# EAGLE board Maverick (EAGLE 9.6.2)
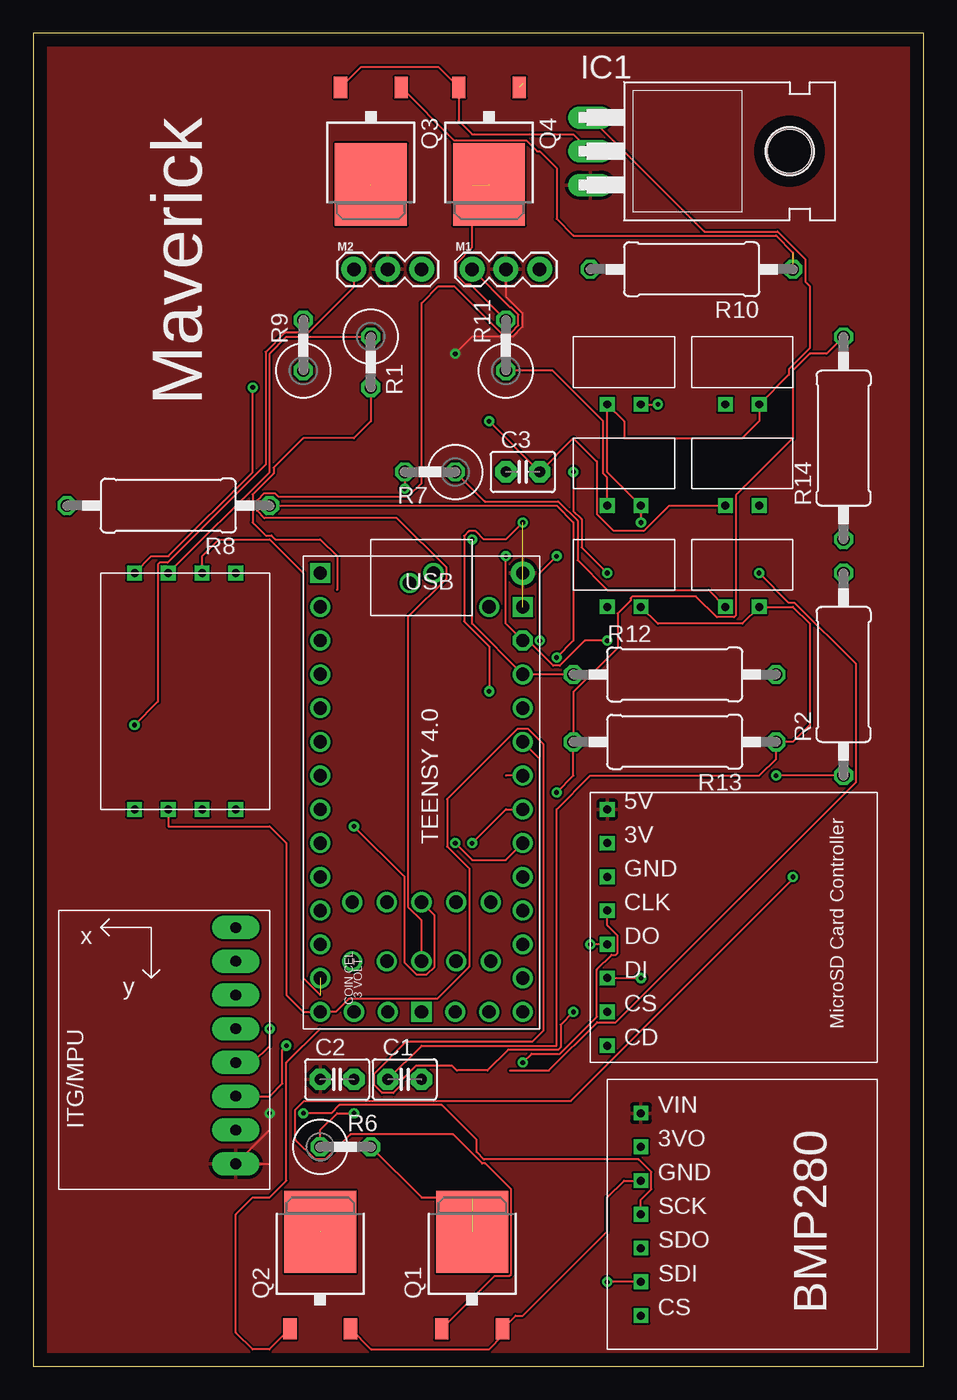
[diagram p0: board, top side]
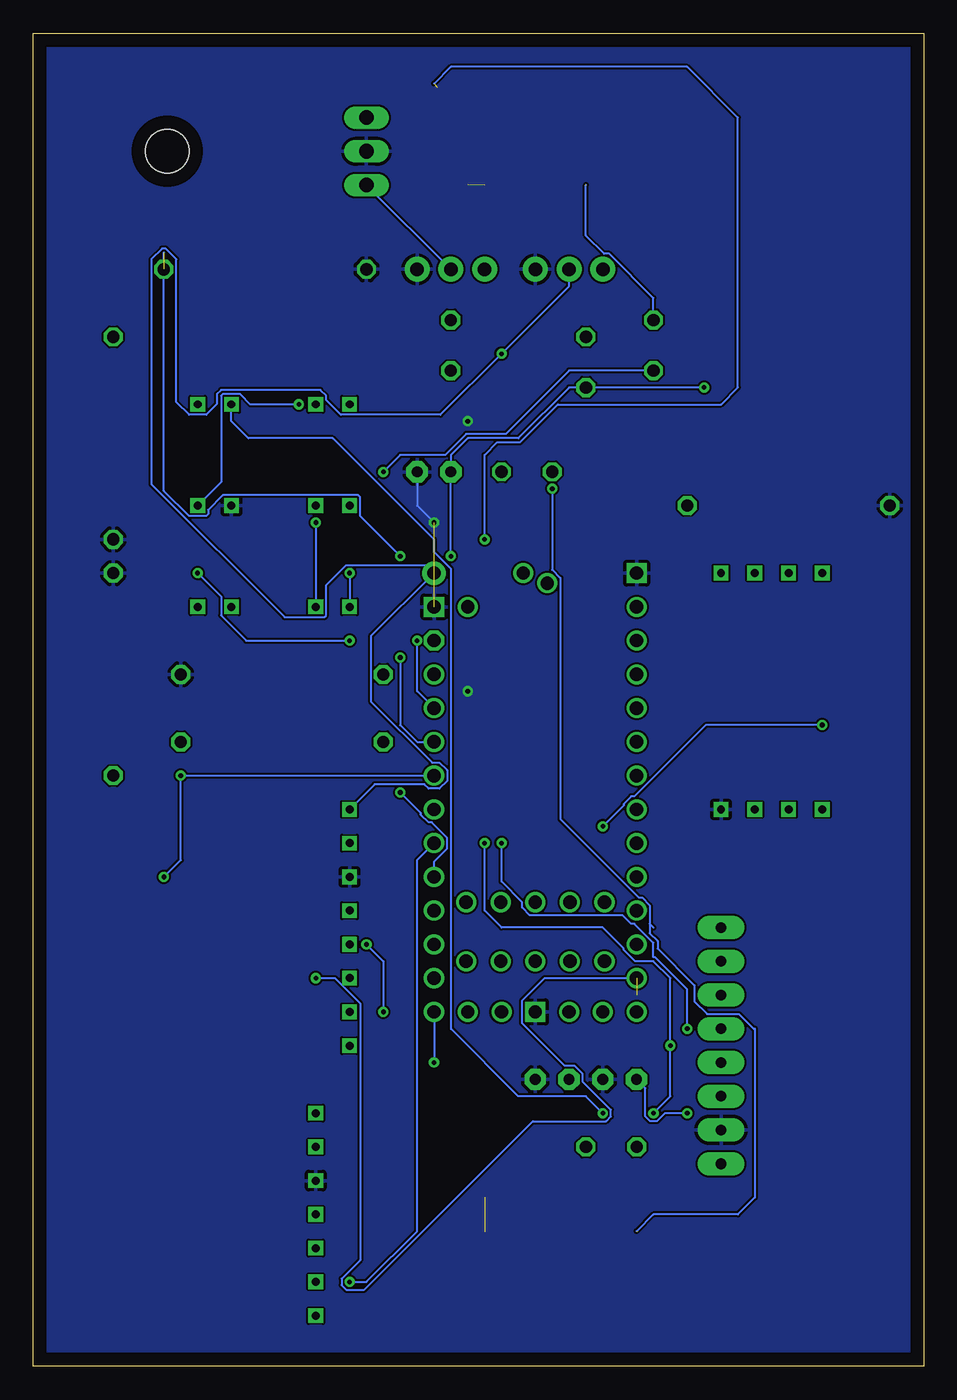
[diagram p1: board, bottom side, seen from below]

Size 66.98 x 100.32 mm. Coordinates in mm from the lower left corner, seen from the top.
Outline: 0,0 66.98,0 66.98,100.32 0,100.32 0,0
Copper layers (1*16): Top 0.035mm / dielectric 1.5mm / Bottom 0.035mm
Design rules "default": minimum track width 6mil, minimum drill 0.35mm, track to track 6mil, track to pad 6mil, pad to pad 6mil, via to via 6mil, smd to smd 6mil, copper to edge 40mil, drill to drill 6mil, minimum pad ring 10mil, minimum via ring 8mil, stop-mask expansion 4mil, vias tented up to drill 0mil, thermal gap 10mil

## Footprints (pad centres in the part's own frame; a part is rotated, then mirrored left to right if it is on the bottom)
C2.5-3 = drill 0.813 pad 1.6 octagon: 1 -1.27,0; 2 1.27,0
TO220H = drill 1.118 long: 1 -2.54,-10.16; 2 0,-10.16; 3 2.54,-10.16 | hole 3.302: 0,4.826
1X03 = drill 1.016 pad 1.88: 1 0,0; 2 2.54,0; 3 5.08,0
TO252 = smd 1 x 1.6: 1 -2.28,-4.8; 2 2.28,-4.8 | smd 5.4 x 6.2: 3 0,2.5
0411V = drill 0.914 octagon: 1 -2.54,0; 2 1.27,0
0411/15 = drill 0.914 octagon: 1 -7.62,0; 2 7.62,0
GY-521 = drill 0.8 pad 1.778 long: ADO -8.89,-6.35; GND -8.89,6.35; INT -8.89,-8.89; SCL -8.89,3.81; SDA -8.89,1.27; VCC -8.89,8.89; XCL -8.89,-3.81; XDA -8.89,-1.27
TEENSY40 = drill 1: 0-RX1 -13.97,-7.62; 1-TX1 -11.43,-7.62; 2-OUT2 -8.89,-7.62; 3-LRCLK2 -6.35,-7.62; 3V3-2 16.51,-2.54; 4-BCLK2 -3.81,-7.62; 5-IN2 -1.27,-7.62; 6-OUT1D 1.27,-7.62; 7-RX2/OUT1A 3.81,-7.62; 8-TX2/IN1 6.35,-7.62; 9-OUT1C 8.89,-7.62; 10-CS/MQSR 11.43,-7.62; 11-MOSI/CTX1 13.97,-7.62; 12-MIO/MQSL 16.51,-7.62; 13-SCK/CRX1/LED 16.51,7.62; 14-A0/TX3/S-PFI_OUT 13.97,7.62; 15-A1/RX3/S-PDIF_IN 11.43,7.62; 16-A2/RX4/SCL1 8.89,7.62; 17-A3/TX4/SDA1 6.35,7.62; 18-A4/SDA0 3.81,7.62; 19-A5/SCL0 1.27,7.62; 20-A6/TX5/LRCLK1 -1.27,7.62; 21-A7/RX5/BCLK1 -3.81,7.62; 22-A8/CTX1 -6.35,7.62; 23-A9/CRX1/CCLK1 -8.89,7.62; 24-A10/TX6/SCL2 12.7,5.207; 25-A11/SDA2 8.255,5.207; 26-A12/MOSI1 12.7,2.603; 27-A13/SCK1 8.255,2.603; 28-RX7 12.7,0; 29-TX7 8.255,0; 30-CRX3 12.7,-2.603; 31-CTX3 8.255,-2.603; 32-OUTB1 12.7,-5.207; 33-MCLK2 8.255,-5.207; D+ -15.75,-0.9; D- -16.51,0.9; ON/OFF 16.51,5.08; PROGRAM 16.51,2.54; VBAT 16.51,-5.08; VUSB -13.97,5.08 | drill 1 octagon: 3V3-1 -11.43,7.62 | drill 1 square: GND1 -16.51,-7.62; GND2 16.51,0; GND3 -13.97,7.62 | drill 1 pad 1.778: VIN -16.51,7.62
BMP280 = drill 0.6 square: 3VO -5.08,-7.62; CS 7.62,-7.62; GND -2.54,-7.62; SCK 0,-7.62; SDI 5.08,-7.62; SDO 2.54,-7.62; VIN -7.62,-7.62
SDCARDHOLDER = drill 0.6 square: 3V -8.89,3.81; 5V -8.89,6.35; CD -8.89,-11.43; CLK -8.89,-1.27; CS -8.89,-8.89; DI -8.89,-6.35; DO -8.89,-3.81; GND -8.89,1.27
FLASHCHIP = drill 0.6 square: CS -8.89,3.81; GND -8.89,-3.81; HOLD(D3) 8.89,1.27; SCK 8.89,-1.27; SI(D0) 8.89,-3.81; SO(D1) -8.89,1.27; VCC 8.89,3.81; WP(D2) -8.89,-1.27
TERMBLOCK = drill 0.6 square: IN -1.27,-3.81; OUT 1.27,-3.81

## Placement (x,y rotation side)
C1  1uf  [C2.5-3]  27.94,21.59 0 top
C2  10uf  [C2.5-3]  22.86,21.59 0 top
C3  [C2.5-3]  36.83,67.31 0 top
IC1  7806T  [TO220H]  52.07,91.44 270 top
M1  SERVO  [1X03]  33.02,82.55 0 top
M2  SERVO  [1X03]  24.13,82.55 0 top
Q1  FDD4141TO252  [TO252]  33.02,7.62 0 top
Q2  FDD4141TO252  [TO252]  21.59,7.62 0 top
Q3  FDD4141TO252  [TO252]  25.4,91.44 180 top
Q4  FDD4141TO252  [TO252]  34.29,91.44 180 top
R1  [0411V]  25.4,74.93 270 top
R2  470ohm  [0411/15]  60.96,52.07 90 top
R6  10ohm  [0411V]  24.13,16.51 0 top
R7  10ohm  [0411V]  29.21,67.31 180 top
R8  470ohm  [0411/15]  10.16,64.77 180 top
R9  10ohm  [0411V]  20.32,77.47 90 top
R10  470ohm  [0411/15]  49.53,82.55 180 top
R11  10ohm  [0411V]  35.56,77.47 90 top
R12  470ohm  [0411/15]  48.26,52.07 0 top
R13  1M  [0411/15]  48.26,46.99 180 top
R14  100k  [0411/15]  60.96,69.85 90 top
U4  GY-521MPU6050  [GY-521]  6.35,24.13 180 top
U$1  TEENSY40  [TEENSY40]  29.21,43.18 270 top
U$2  BMP280  [BMP280]  53.34,11.43 270 top
U$3  SDCARDHOLDER  [SDCARDHOLDER]  52.07,35.56 0 top
U$4  FLASHCHIP  [FLASHCHIP]  11.43,50.8 90 top
U$6  TERMBLOCK  [TERMBLOCK]  53.34,76.2 0 top
U$7  TERMBLOCK  [TERMBLOCK]  53.34,60.96 0 top
U$8  TERMBLOCK  [TERMBLOCK]  44.45,60.96 0 top
U$9  TERMBLOCK  [TERMBLOCK]  44.45,68.58 0 top
U$10  TERMBLOCK  [TERMBLOCK]  53.34,68.58 0 top
U$11  TERMBLOCK  [TERMBLOCK]  44.45,76.2 0 top

## Library data of the parts
C1-C3 = capacitor-wima
IC1 = linear
M1 M2 = SparkFun-Electromechanical
Q1-Q4 = transistor-fet
R1 R2 R6-R14 = rcl; SPICEPREFIX: R
U4 = gy-521
U$1 = teensy
U$2 = BMP280
U$3 = MicroSD Card Controller
U$4 = Flash Chip
U$6-U$11 = Terminal Block

## Nets
3.3V: C3.1 R1.2 U$1.3V3-1 U$4.VCC
5V: C2.1 IC1.3 M1.2 M2.2 U4.VCC U$1.VIN U$2.VIN U$3.5V
12V: C1.1 IC1.1 R13.1 U$6.OUT U$7.OUT U$8.OUT U$9.OUT U$11.IN
BATT+: U$10.OUT U$11.OUT
FLASH-CS: U$4.CS
GND: C1.2 C2.2 C3.2 IC1.2 M1.3 M2.3 Q1.2 Q2.2 Q3.2 Q4.2 R2.2 R8.2 R10.2 R12.2 R14.1 U4.GND U$1.GND1 U$1.GND2 U$1.GND3 U$2.GND U$3.GND U$4.GND U$10.IN
MISO: U$1.12-MIO/MQSL U$3.DO U$4.SO(D1)
MOSI: U$1.11-MOSI/CTX1 U$3.DI U$4.SCK
N$1: R1.1 U$4.HOLD(D3)
N$9: Q1.3 R6.2
N$10: R6.1 U$6.IN
N$12: R7.1 U$7.IN
N$13: Q2.3 R7.2
N$15: R9.1 U$8.IN
N$16: Q3.3 R9.2
N$18: R11.1 U$9.IN
N$19: Q4.3 R11.2
PY1: Q1.1 R2.1 U$1.20-A6/TX5/LRCLK1
PY2: Q2.1 R8.1 U$1.21-A7/RX5/BCLK1
PY3: Q3.1 R10.1 U$1.22-A8/CTX1
PY4: Q4.1 R12.1 U$1.23-A9/CRX1/CCLK1
SCK: U$1.13-SCK/CRX1/LED U$3.CLK
SCL: U4.SCL U$1.19-A5/SCL0 U$2.SCK
SD-CS: U$3.CS
SDA: U4.SDA U$1.18-A4/SDA0 U$2.SDI
SKC: U$4.SI(D0)
TVCX: M1.1 U$1.28-RX7
TVCY: M2.1 U$1.29-TX7
VOLTAGE: R13.2 R14.2 U$1.17-A3/TX4/SDA1

## Tracks (layer width: path | path; a pad name or v marks a point on that pad's centre or on a via)
3.3V  (via drill 0.35)
  Top 0.152: U$4.VCC 8.89,60.96 10.16,60.96 16.51,67.31 v16.51,73.66 | R1.2 25.4,71.12 24.13,69.85 20.32,69.85 18.08,67.61 18.08,67.18 16.51,65.61 16.51,63.5 17.47,62.53 17.91,62.53 18.21,62.23 21.59,62.23 22.86,60.96 22.86,58.42 | v54.61,59.69 56.84,57.45 57.28,57.45 61.9,52.83 61.9,43.96 43.83,25.89 42.42,25.89 38.79,22.25 35.88,22.25 | v43.18,54.61 41.5,54.61 39.62,52.73 39.12,52.73 37.24,54.61 U$1.3V3-1 35.56,55.88 v35.56,60.96
  Bottom 0.152: v16.51,73.66 R1.2 26.67,73.66 30.48,69.85 34.29,69.85 35.56,68.58 C3.1 v35.56,60.96 | v54.61,59.69 52.85,57.93 52.85,56.5 50.96,54.61 v43.18,54.61
5V  (via drill 0.35)
  Top 0.152: 17.78,15.24 U4.VCC 17.78,17.78 v17.78,19.05 | v31.75,76.2 33.05,77.5 36.08,77.5 36.8,78.22 36.8,79.26 35.56,80.5 M1.2
  Bottom 0.152: M1.2 IC1.3 | U$3.5V 41.3,43.79 37.56,43.79 37.24,43.47 36.42,43.47 35.85,44.04 35.85,44.86 36.42,45.43 36.97,45.43 41.58,50.04 41.58,54.94 U$1.VIN 37.44,60.3 43.43,60.3 44.94,58.79 44.94,56.5 45.07,56.37 48.07,56.37 58.09,66.39 58.09,83.31 57.28,84.12 57.02,84.12 56.21,83.31 56.21,72.56 55.26,71.61 53.96,71.61 53.16,72.41 53.16,73.17 52.84,73.48 45.38,73.48 44.94,73.04 44.94,72.72 43.83,71.61 36.34,71.61 v31.75,76.2 26.67,81.28 M2.2 | v17.78,19.05 19.46,19.05 20.07,18.44 20.57,18.44 20.93,18.8 20.93,20.93 C2.1
  pour Top: -7.62,-2.54 -7.62,104.14 76.2,104.14 76.2,-2.54
12V  (via drill 0.35)
  Top 0.152: U$8.OUT 46.99,55.88 53.34,55.88 U$7.OUT 57.15,57.15 58.42,55.88 58.42,48.26 57.15,46.99 R13.1 55.88,45.72 54.61,44.45 41.91,44.45 39.37,41.91 39.37,24.13 29.21,24.13 C1.1 | v45.72,63.5 U$9.OUT 43.18,67.31 U$11.IN 44.45,71.12 44.45,69.85 53.34,69.85 54.61,71.12 U$6.OUT 56.84,74.62 56.84,75.06 58.42,76.63 58.42,81.28 58.09,81.61 58.09,83.31 56.01,85.39 50.49,85.39 IC1.1
  Bottom 0.152: v45.72,63.5 U$8.OUT
BATT+  (via drill 0.35)
  Top 0.152: U$11.OUT v46.99,72.39
  Bottom 0.152: U$10.OUT 52.85,66.53 52.85,73.04 52.72,73.17 51.42,73.17 50.64,72.39 v46.99,72.39
GND  (via drill 0.35)  (1 unrouted)
  Top 0.152: Q2.2 25.4,1.29 25.4,1.27 34.29,1.27 35.3,2.28 Q1.2 36.29,3.81 36.83,3.81 43.18,10.16 43.18,12.7 44.45,13.97 U$2.GND | Q3.2 24.67,97.79 30.46,97.79 Q4.2 32.01,93.72 33.02,92.71 40.64,92.71 IC1.2 | U$10.IN 47.85,64.77 45.97,62.89 43.63,62.89 42.4,64.12 42.4,68.09 40.64,69.85 C3.2 v34.29,71.12 | v36.83,63.5 35.56,62.23 33.88,62.23 33.27,62.84 32.77,62.84 32.41,62.48 32.41,56.06 34.29,54.18 v34.29,50.8
  Bottom 0.152: C3.2 38.1,64.77 v36.83,63.5
  pour Bottom: -3.81,-5.08 -3.81,104.14 73.66,104.14 73.66,-3.81 -2.54,-3.81
MISO  (via drill 0.35)
  Top 0.152: U$4.SO(D1) 10.16,40.64 17.78,40.64 19.05,39.37 19.05,27.94 20.32,26.67 U$1.12-MIO/MQSL 22.74,26.67 23.72,27.65 30.38,27.65 32.8,30.07 32.8,37.47 31.14,39.12 31.14,42.69 36.42,47.97 37.24,47.97 38.41,46.8 38.41,25.27 37.57,24.43 28.06,24.43 25.64,22.02 25.64,21.16 26.24,20.56 27.1,20.56 27.7,21.16 27.7,21.53 28.78,22.62 31.52,22.62 31.87,22.26 34.16,22.26 35.73,23.82 39.5,23.82 39.67,24 39.67,25.7 v40.64,26.67 | U$3.DO v41.91,31.75
  Bottom 0.152: v41.91,31.75 40.64,30.48 v40.64,26.67
MOSI  (via drill 0.35)  (1 unrouted)
  Top 0.152: U$4.SCK 12.7,60.96 13.97,62.23 17.78,62.23 20.32,59.69 20.32,29.21 21.59,27.94 | U$3.DI v45.72,29.21
  Bottom 0.152: v45.72,29.21 44.29,29.21 42.4,27.32 42.4,7.99 43.79,6.6 43.79,6.1 43.43,5.74 42.09,5.74 29.39,18.44 23.88,18.44 23.52,18.8 23.52,19.3 25.64,21.42 25.64,22.02 26.24,22.62 26.99,22.62 30.19,25.82 30.19,27.52 28.5,29.21 U$1.11-MOSI/CTX1
N$1
  Top 0.152: U$4.HOLD(D3) 17.78,67.31 17.78,76.2 19.05,77.47 R1.1
N$9  (1 unrouted)
  Top 0.152: R6.2 29.21,12.7 33.02,12.7
N$10  (via drill 0.35)
  Top 0.152: R6.1 21.59,17.78 22.86,19.05 v24.13,19.05
  Bottom 0.152: v24.13,19.05 25.4,20.32 30.48,20.32 35.54,25.38 35.54,59.98 36.83,61.27 36.83,62.23 44.45,69.85 50.8,69.85 52.07,71.12 U$6.IN
N$12
  Top 0.152: R7.1 33.98,65.08 39.5,65.08 40.94,63.63 40.94,60.66 43.18,58.42 50.8,58.42 U$7.IN
N$13  (via drill 0.35)  (1 unrouted)
  Top 0.152: R7.2 v27.94,66.04
  Bottom 0.152: v27.94,66.04 27.94,59.95 27.33,59.34 27.33,41.18 21.42,35.27 21.18,35.27 20.61,34.7 20.61,33.31 | 20.61,33.31 20.32,33.02 | 20.61,33.31 20.61,32.59 20.01,32 20.01,31.45 17.25,28.68 17.25,27.48 16.29,26.52 13.89,26.52 12.77,25.4 12.7,25.4 12.7,12.7 13.97,11.43 20.32,11.43 21.59,10.16
N$15  (via drill 0.35)
  Top 0.152: v43.18,59.69 41.25,61.62 41.25,63.75 40.64,64.36 v40.64,67.31
  Bottom 0.152: R9.1 26.67,74.93 31.44,70.16 34.42,70.16 35.99,68.58 39.37,68.58 v40.64,67.31 | v43.18,59.69 U$8.IN
N$16  (1 unrouted)
  Bottom 0.152: R9.2 20.32,80.39 23.65,83.72 24.03,83.72 25.4,85.09 25.4,88.9
N$18
  Top 0.152: U$9.IN 43.18,66.88 42.88,67.18 42.88,71.12 39.06,74.93 R11.1
N$19  (1 unrouted)
  Top 0.152: 33.02,88.9 33.02,84.2 31.85,83.03 31.85,82.07 32.54,81.38 32.92,81.38 R11.2
PY1  (via drill 0.35)
  Top 0.152: R2.1 v55.88,44.45 | U$1.20-A6/TX5/LRCLK1 35.56,44.45 | Q1.1 34.71,6.79 35.81,6.79 35.95,6.92 35.95,13.31 34,15.27 33.77,15.27 31.59,17.45 23.86,17.45 21.98,15.57 21.2,15.57 19.71,17.06 19.71,19.3 20.37,19.96 40.44,19.96 57.15,36.67 v57.15,36.83
  Bottom 0.152: U$1.20-A6/TX5/LRCLK1 v55.88,44.45 55.88,38.1 v57.15,36.83
PY2  (via drill 0.35)
  Top 0.152: R8.1 39.37,64.77 40.64,63.5 40.64,54.61 v39.37,53.34 | Q2.1 17.76,1.27 16.51,1.27 15.24,2.54 15.24,11.43 16.51,12.7 17.78,12.7 19.05,13.97 19.05,22.86 21.59,25.4 38.1,25.4 38.1,45.72 U$1.21-A7/RX5/BCLK1
  Bottom 0.152: v39.37,53.34 39.37,48.26 38.1,46.99 U$1.21-A7/RX5/BCLK1
PY3  (via drill 0.35)  (1 unrouted)
  Top 0.152: Q3.1 31.65,92.27 37.08,92.27 37.91,91.44 38.1,91.44 39.37,90.17 39.37,86.36 40.64,85.09 55.88,85.09 57.15,83.82 R10.1 | v38.1,54.61 38.1,59.69 v39.37,60.96
  Bottom 0.152: U$1.22-A8/CTX1 38.1,50.8 v38.1,54.61 | v39.37,60.96 42.4,63.99 42.4,65.42 42.53,65.55 52.72,65.55 53.83,64.44 53.83,64.12 53.96,63.99 55.26,63.99 57.15,65.88 57.15,83.82
PY4  (via drill 0.35)  (1 unrouted)
  Top 0.152: R12.1 U$1.23-A9/CRX1/CCLK1 33.02,55.88 v33.02,62.23
  Bottom 0.152: v33.02,62.23 33.02,68.58 32.05,69.55 30.35,69.55 27.51,72.39 15.24,72.39 13.97,73.66 13.97,93.98 17.78,97.79 35.56,97.79 36.83,96.52
SCK  (via drill 0.35)
  Top 0.152: v36.83,22.86 37.49,23.52 39.62,23.52 42.4,26.3 42.4,29.86 43.51,30.97 43.83,30.97 43.96,31.1 43.96,32.4 43.18,33.18 U$3.CLK
  Bottom 0.152: U$1.13-SCK/CRX1/LED v36.83,22.86
SCL  (via drill 0.35)
  Top 0.152: U4.SCL 17.78,20.32 18.75,21.29 18.75,23.82 v19.05,24.13 | v33.02,39.37 35.56,41.91 U$1.19-A5/SCL0 | v20.32,19.05 22.43,19.05 23.04,19.66 30.73,19.66 33.35,17.04 33.35,16.12 33.9,15.57 45.55,15.57 46.5,14.62 46.5,13.32 45.72,12.54 U$2.SCK
  Bottom 0.152: v33.02,39.37 33.02,34.29 31.75,33.02 24.13,33.02 22.57,31.46 22.57,31.34 21.71,30.48 20.32,30.48 19.05,29.21 v19.05,24.13 19.05,20.32 v20.32,19.05
SDA  (via drill 0.35)
  Top 0.152: U$2.SDI v43.18,6.35 | U4.SDA 16.51,22.86 17.78,24.13 v17.78,25.4 | v31.75,39.37 33.02,38.1 35.56,38.1 U$1.18-A4/SDA0
  Bottom 0.152: v43.18,6.35 41.91,6.35 38.1,10.16 38.1,38.1 U$1.18-A4/SDA0 | v17.78,25.4 17.78,28.37 20.19,30.79 20.32,30.79 20.32,31.87 21.76,33.31 22,33.31 22.63,33.94 29.62,33.94 30.19,34.52 30.19,34.92 31.75,36.48 v31.75,39.37
TVCX
  Top 0.152: U$1.28-RX7 29.21,33.53 28.23,34.52 28.23,56.42 31.09,59.28 31.09,60.1 27.36,63.83 17.39,63.83 16.84,64.38 16.84,65.16 17.39,65.71 18.17,65.71 18.45,65.43 28.19,65.43 29.21,66.45 29.21,80.01 30.48,81.28 31.69,81.28 35.17,77.8 35.95,77.8 36.5,78.35 36.5,79.13 35.95,79.68 35.89,79.68 M1.1
TVCY  (via drill 0.35)
  Top 0.152: M2.1 24.13,81.22 20.68,77.78 18.92,77.78 17.47,76.33 17.47,67.84 10.1,60.47 9.51,60.47 9.38,60.34 9.38,50.02 v7.62,48.26 | v24.13,40.64 27.92,36.85 27.92,30.38 28.8,29.5 29.62,29.5 30.19,30.07 30.19,33.94 U$1.29-TX7
  Bottom 0.152: v24.13,40.64 22.57,42.2 22.57,42.32 22,42.89 21.76,42.89 16.39,48.26 v7.62,48.26
VOLTAGE  (via drill 0.35)
  Top 0.152: R14.2 59.69,76.2 58.42,76.2 57.15,74.93 57.15,69.85 52.85,65.55 52.85,56.5 52.72,56.37 51.42,56.37 49.86,57.93 45.07,57.93 44.94,57.8 44.94,57.64 43.96,56.66 43.96,54.06 40.64,50.74 R13.2 40.64,44.45 v39.37,43.18
  Bottom 0.152: v39.37,43.18 37.81,41.62 37.81,41.5 37.24,40.93 37,40.93 35.85,39.78 35.85,38.96 36.83,37.98 U$1.17-A3/TX4/SDA1

## Text on the board
tNames: Maverick